# Altium PCB PCB.PcbDoc
Units mm, origin at the board's own origin, x right, y up, seen from the top; angles counter-clockwise.
Board outline 10.67 x 10.41 mm, 2 copper layers (Top Layer, Bottom Layer); 5 components, 8 nets, 28 pads, 0 vias.
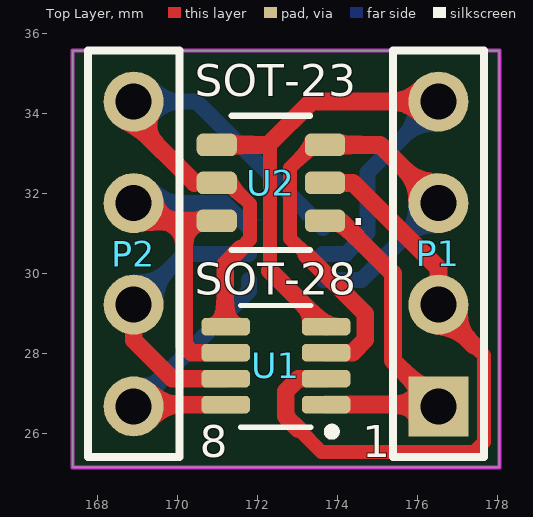
[diagram p0: Top Layer view]
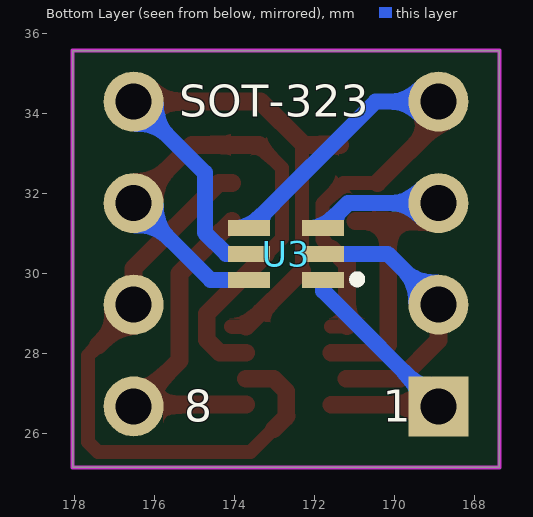
[diagram p1: Bottom Layer view, seen from below]

## Layer stack, top to bottom
Top Solder: solder mask 0.0102, Solder Resist, Dk 3.5
Top Layer: signal copper 0.0356
Dielectric 1: dielectric 0.32, FR-4, Dk 4.8
Bottom Layer: signal copper 0.0356
Bottom Solder: solder mask 0.0102, Solder Resist, Dk 3.5

## Board outline
167.386,35.56 178.054,35.56 178.054,25.146 167.386,25.146

## Design rules (kind name [scope] priority, off if disabled: settings)
Clearance [All] p1: gap=0.152 ignorepadtopadclearanceinfootprint=FALSE except(0: Arc-Hole Track-Hole SMDPad-Hole THPad-Hole Via-Hole Fill-Hole Poly-Hole Region-Hole Text-Hole)
HoleSize [All] p1: absolutevalues=TRUE maxlimit=6.2 minlimit=0.3 maxpercent=80.000 minpercent=20.000
MinimumSolderMaskSliver [All] p1: minsoldermaskwidth=0.1
PolygonConnect ViaConnect [IsVia] p1: connectstyle=Direct reliefconductorwidth=0.254 reliefentries=4 polygonreliefangle="90 Angle" airgapwidth=0.254
PolygonConnect [All] p2: connectstyle=Relief reliefconductorwidth=0.254 reliefentries=4 polygonreliefangle="90 Angle" airgapwidth=0.254
RoutingVias [All] p1: holewidth=0.3 width=0.6 viastyle="Through Hole" minholewidth=0.3 minwidth=0.5 maxholewidth=1 maxwidth=5
SilkToSilkClearance [All] p1: silktosilkclearance=0.1
SilkToSolderMaskClearance [IsPad] p1: minsilkscreentomaskgap=0.1 clearancetoexposedcopper=TRUE
SolderMaskExpansion [All] p1: expansion=0.051
Width [All] p1: maxlimit=25.4 minlimit=0.15 preferedwidth=0.3
26 further rules are at their usual default settings.

## Components (designator, comment, footprint, x,y, rotation, side; value= is the part's Value field where it differs from the comment)
P1 "Header 4" HDR1X4#1 176.53,26.67 r90 top locked
P2 "Header 4" HDR1X4#2 168.91,34.29 r270 top
U1 "MAX11600EKAT" SOT65P280X145-8N 172.466,27.686 r180 top
U2 "AP3445LW6-7" SOT26_AP3445_DIO 172.339,32.258 r180 top
U3 "ESDA6V1-5W6" DIO_ESDA6V1-5W6 172.72,30.48 r0 bottom

## Footprints (in the part's own frame and the unit in brackets; to place one, negate y for a bottom-side part, rotate by r counter-clockwise, add the part's x,y. Pads: shape width x height; smd on the part's side, far side on the other; paste and mask are expansions set on the pad)
DIO_ESDA6V1-5W6 [mm]
  rect 1.05x0.4 smd: 1(-0.925,0.65) 2(-0.925,0) 3(-0.925,-0.65) 4(0.925,-0.65) 5(0.925,0) 6(0.925,0.65)
  silkscreen extent -1.88,0.54 -1.68,0.73, body extent -1.05,-1 1.05,1, height 1.1
HDR1X4#1 [mm] "Connector; Header; 4 Position"
  rect 1.5x1.5 / inner rect 1.5x1.5 / far side round 1.5 hole 0.9: 1(0,0)
  round 1.5 hole 0.9: 2(2.54,0) 3(5.08,0) 4(7.62,0)
  silkscreen extent -1.27,-1.14 8.89,1.14
HDR1X4#2 [mm] "Connector; Header; 4 Position"
  round 1.5 hole 0.9: 1(0,0) 2(2.54,0) 3(5.08,0)
  round 1.5 / inner round 1.5 / far side rect 1.5x1.5 hole 0.9: 4(7.62,0)
  silkscreen extent -1.27,-1.14 8.89,1.14
SOT26_AP3445_DIO [mil]
  rrect50% 39.5x22 smd paste+0 mask+0: 1(-53.25,37.4) 2(-53.25,0) 3(-53.25,-37.4) 4(53.25,-37.4) 5(53.25,0) 6(53.25,37.4)
  silkscreen extent -39,-66 39,66, body extent -59,-61 59,61, height 55
SOT65P280X145-8N [mm]
  rrect50% 1.21x0.44 smd: 1(-1.255,0.975) 2(-1.255,0.325) 3(-1.255,-0.325) 4(-1.255,-0.975) 5(1.255,-0.975) 6(1.255,-0.325) 7(1.255,0.325) 8(1.255,0.975)
  silkscreen extent -1.5,-1.5 0.88,1.75, body extent -1.4,-1.45 1.4,1.45, height 1.45

## Part data
P1 P2: "Header, 4-Pin", LatestRevisionDate=17-Jul-2002, LatestRevisionNote="Re-released for DXP Platform.", Publisher="Altium Limited"
U1: "8 Bit Analog to Digital Converter 2, 4 Input 1 SAR SOT-23-8", Package="SOT-8 Maxim", Availability="In Stock", Check_prices=https://www.snapeda.com/parts/MAX11600EKA+T/Maxim%20Integrated/view-part/609916/?ref=eda, MF="Maxim Integrated", MP=MAX11600EKA+T, Price=None, Purchase-URL=https://pricing.snapeda.com/search/part/MAX11600EKA+T/?ref=eda, SnapEDA_Link=https://www.snapeda.com/parts/MAX11600EKA+T/Maxim%20Integrated/view-part/609916/?ref=snap
U2: "No Description Available", Mfr_Name="Diodes Inc", Copyright="Copyright (C) 2024 Ultra Librarian. All rights reserved.", Manufacturer_Part_Number=AP3445LW6-7, RefDes=RefDes, Type=DEV
U3: "- Clamp - Ipp Tvs Diode Surface Mount SOT-323-6L", Package="SOT-323 STMicroelectronics", Availability="In Stock", Check_prices=https://www.snapeda.com/parts/ESDA6V1-5W6/STMicroelectronics/view-part/?ref=eda, MF=STMicroelectronics, MP=ESDA6V1-5W6, Price=None, Purchase-URL=https://pricing.snapeda.com/search?q=ESDA6V1-5W6&ref=eda, SnapEDA_Link=https://www.snapeda.com/parts/ESDA6V1-5W6/STMicroelectronics/view-part/?ref=snap

## Nets (pads, with @x,y where several pads share a name; then routed paths per layer and width w, separated by ;. In a path a pad name is that pad's centre, name@x,y a point inside that pad or via, vN(x,y) a via of type N, cw(c..) or ccw(c..) an arc to the next point about the centre after c; other vN are vias at no path point)
1: P1.1 U1.1 U2.1 | length 8.4
  Top Layer w0.4: P1.1@176.489,26.711 P1.1
  Top Layer w0.45: U1.1 176.489,26.711 175.387,27.813 175.387,29.994 U2.1@174.073,31.308
2: P1.2 U1.2 U2.2 | length 15.4
  Top Layer w0.35: 173.036,26.1 173.609,25.527 177.419,25.527 177.673,25.781 177.673,27.94 177.419,28.194
  Top Layer w0.44: 172.714,26.422 172.714,27.047 173.027,27.361 U1.2 ; 172.739,26.385 173.03,26.094
  Top Layer w0.45: 172.714,26.422 172.739,26.397 172.739,26.385 ; U2.2@174.073,32.258 174.392,32.258 176.53,30.12 P1.2 176.53,29.083 177.419,28.194
3: P1.3 U1.3 U2.3 U3.6 | length 14.4
  Top Layer w0.35: 173.228,30.462 172.82,30.87 172.82,32.631 U2.3@173.397,33.208
  Top Layer w0.44: 173.228,30.462 174.703,28.987 174.703,28.335 174.379,28.011 U1.3
  Top Layer w0.45: U2.3@173.397,33.208 U2.3 175.072,33.208 P1.3
  Bottom Layer w0.4: U3.6 174.61,29.83 P1.3
4: P1.4 U1.4 U2.4 U3.5 | length 16.5
  Top Layer w0.35: 172.273,33.208 172.318,33.163 172.318,30.064 ; U1.4 U1.4@174.102,28.661
  Top Layer w0.44: 172.318,30.064 U1.4
  Top Layer w0.45: U2.4@171.367,33.208 172.273,33.208 173.355,34.29 P1.4
  Bottom Layer w0.4: U3.5 174.218,30.48 174.752,31.014 174.752,32.512 P1.4
5: P2.1 U1.5 U2.5 U3.4 | length 14
  Top Layer w0.35: P2.1@168.91,33.782 P2.1 ; 170.434,32.258 U2.5 171.281,32.258 171.816,31.723 171.816,30.846 171.577,30.607 ; U1.5@171.196,28.676 U1.5 U1.5@171.592,28.661
  Top Layer w0.44: U1.5@171.196,28.676 171.196,30.226 171.577,30.607
  Top Layer w0.45: P2.1@168.91,33.782 170.434,32.258
  Bottom Layer w0.4: P2.1 170.485,34.29 U3.4
6: P2.2 U1.6 U2.6 U3.3 | length 10
  Top Layer w0.44: P2.2 P2.2@169.352,31.308 ; 170.169,31.308 170.169,28.205 170.363,28.011 U1.6 U1.6@171.592,28.011
  Top Layer w0.45: P2.2@169.352,31.308 170.169,31.308 U2.6
  Bottom Layer w0.4: P2.2 171.175,31.75 U3.3
7: P2.3 U1.7 U3.2 | length 7
  Top Layer w0.44: P2.3 168.91,28.321 169.87,27.361 U1.7
  Bottom Layer w0.4: P2.3 170.18,30.48 U3.2
8: P2.4 U1.8 U3.1 | length 7.1
  Top Layer w0.44: P2.4 168.951,26.711 U1.8 U1.8@171.592,26.711
  Bottom Layer w0.4: P2.4 171.795,29.555 U3.1

## Keep-outs
Keep-Out Layer:
  the board outline again, w0.1

## Silkscreen, mask and mechanical layers (free items; w line width, h text height)
Top Overlay:
  text "SOT-23" at 170.434,34.417 h0.8
  text "SOT-28" at 170.434,29.464 h0.8
  text "8" at 170.561,25.4 h0.8
  text "1" at 174.625,25.4 h0.8
Bottom Overlay:
  text "SOT-323" at 175.387,33.909 h0.8
  text "1" at 170.307,26.289 h0.8
  text "8" at 175.26,26.289 h0.8

## Text inside footprints (layer, text, board x,y; h text height)
U2: Mechanical 13 "*" at 173.126,32.055 h1.27 r180